# Altium PCB GWNv3.PcbDoc
Units mil, origin at the board's own origin, x right, y up, seen from the top; angles counter-clockwise.
Board outline 3000 x 2200 mil, 2 copper layers (Top Layer, Bottom Layer); 55 components, 57 nets, 281 pads, 3 vias.
Unrouted connection lines stored in the file: 1.
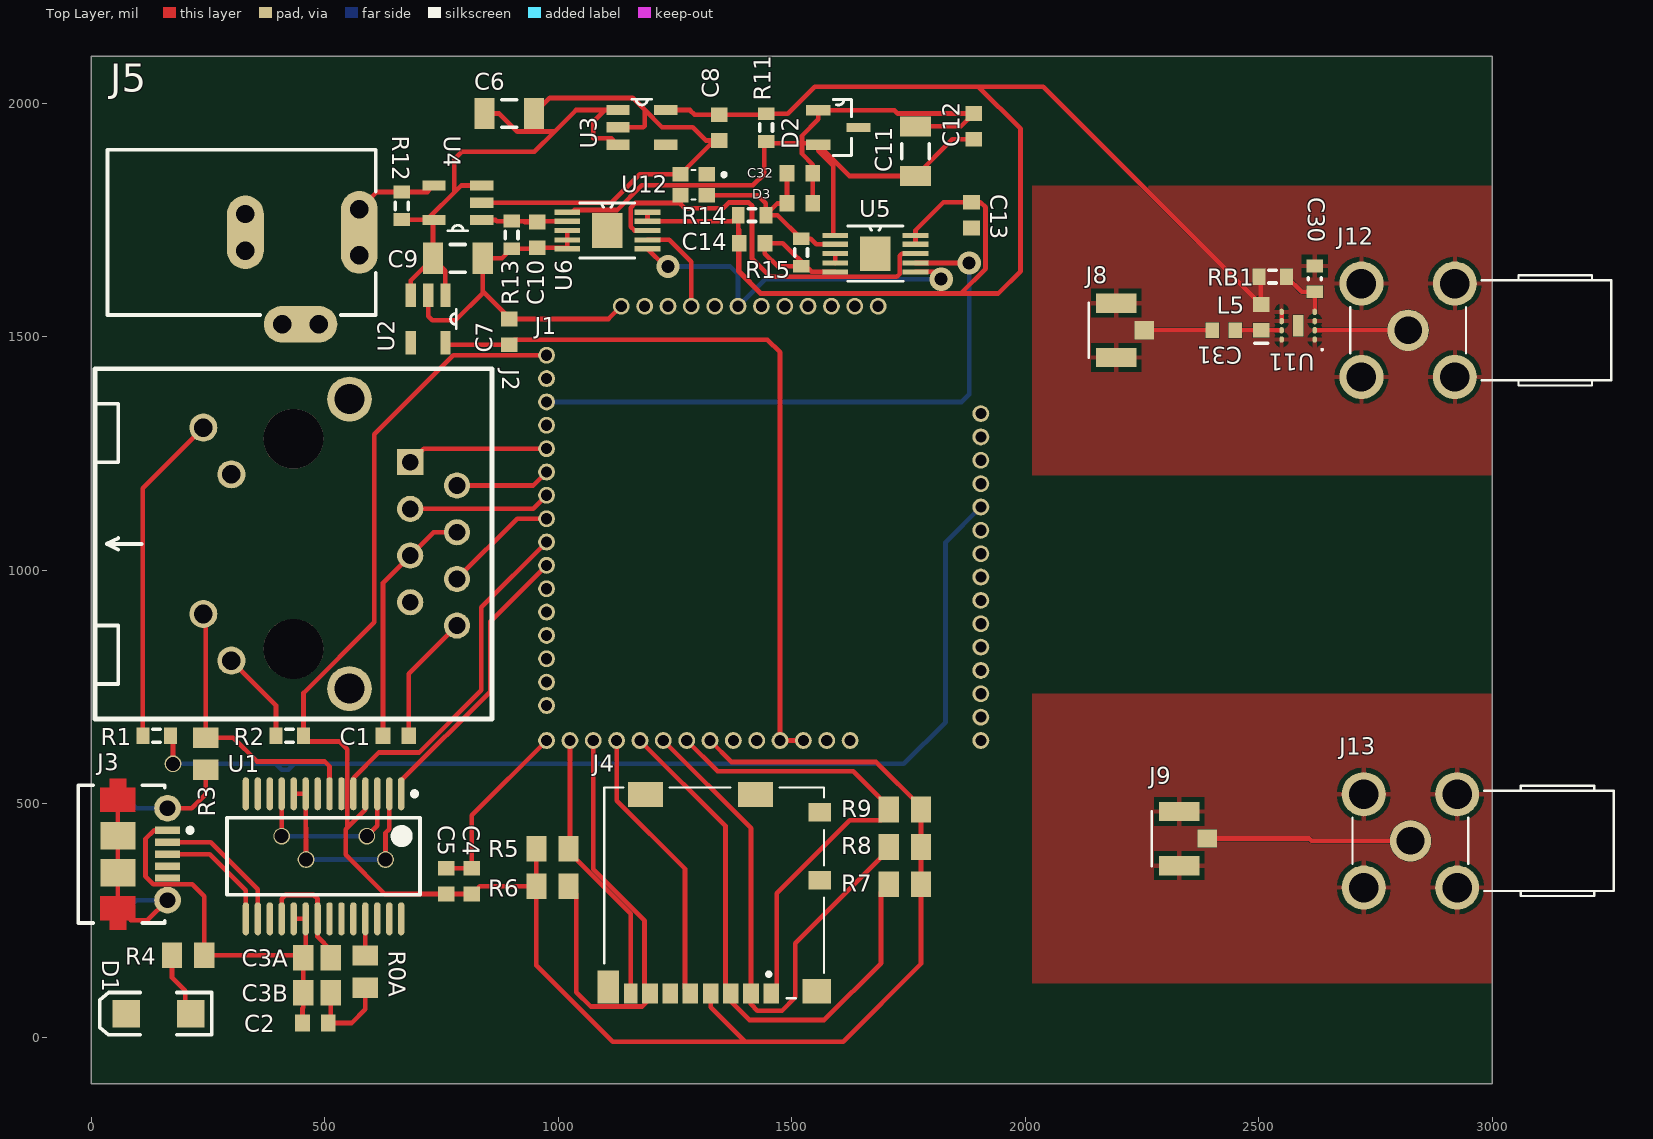
[diagram p0: Top Layer view]
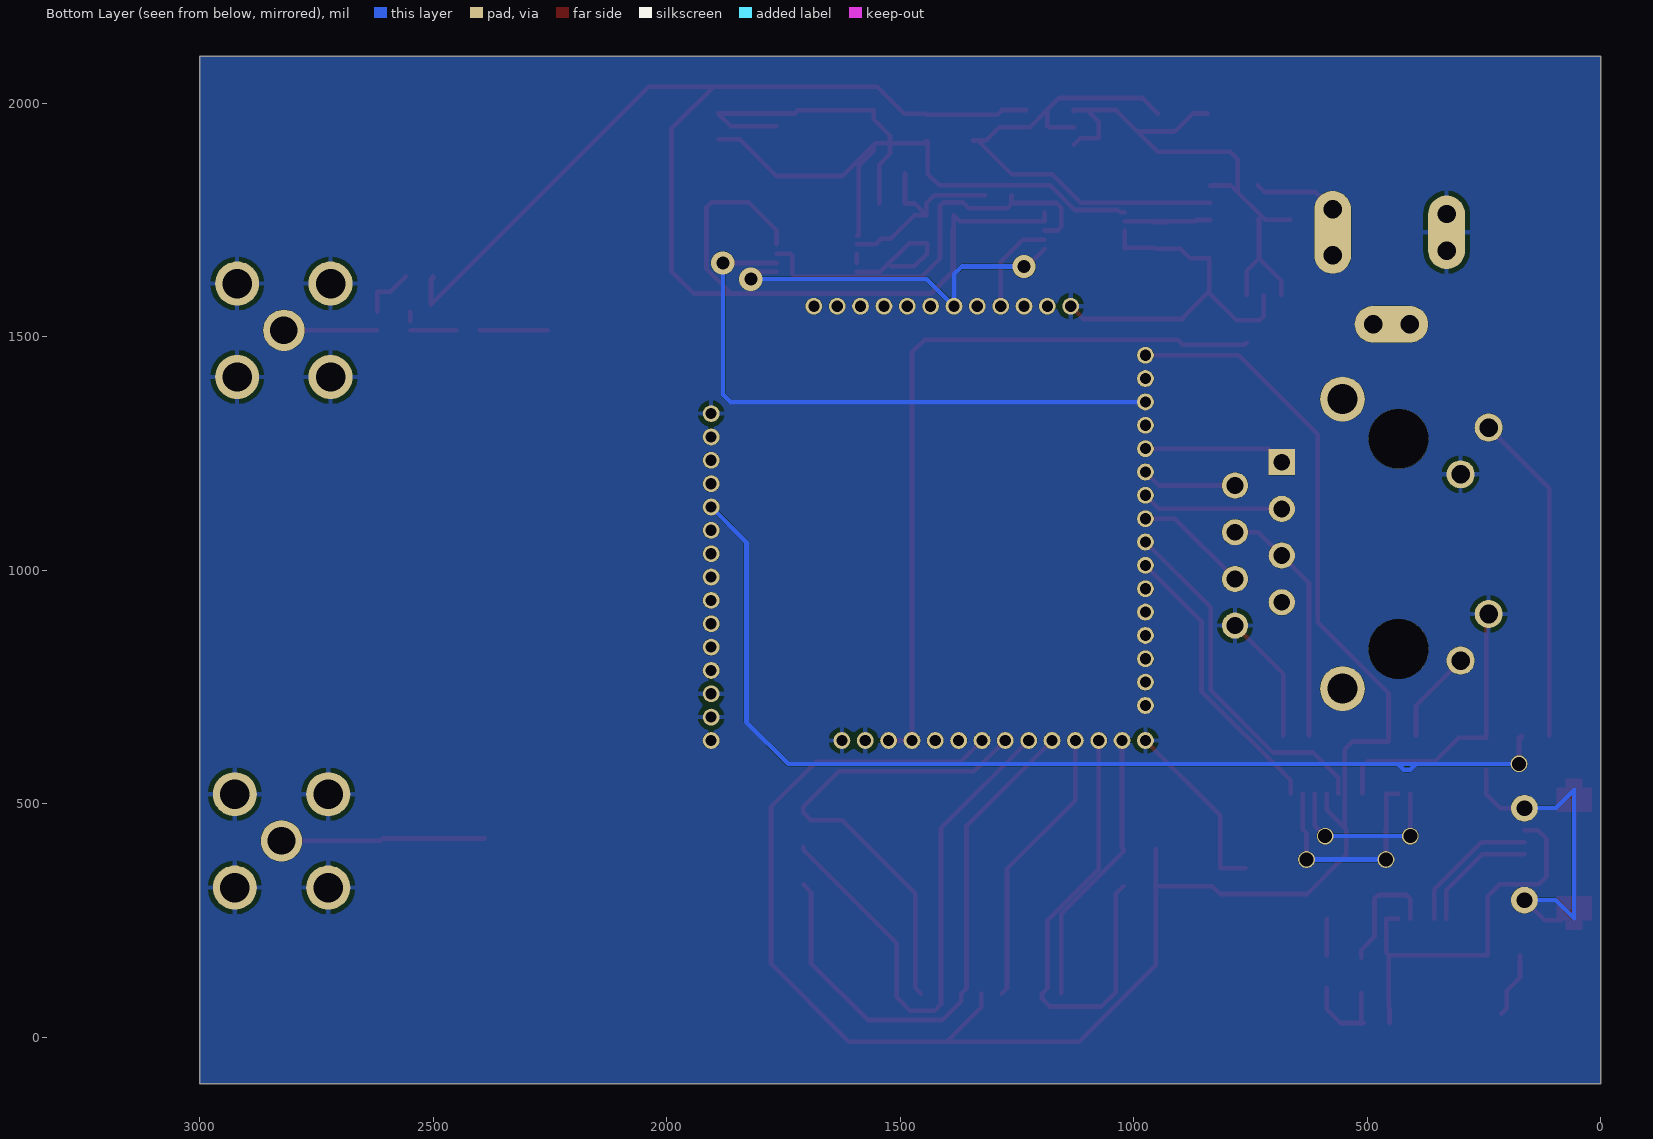
[diagram p1: Bottom Layer view, seen from below]

## Layer stack, top to bottom
Top Solder: solder mask 0.4, Solder Resist, Dk 3.5
Top Layer: signal copper 1.4
Dielectric 1: dielectric 12.6, FR-4, Dk 4.8
Bottom Layer: signal copper 1.4
Bottom Solder: solder mask 0.4, Solder Resist, Dk 3.5

## Board outline
0,-100 3000,-100 3000,2100 0,2100

## Design rules (kind name [scope] priority, off if disabled: settings)
Clearance [All] p1: gap=0 ignorepadtopadclearanceinfootprint=TRUE
HoleToHoleClearance [All] p1: gap=5 allowstackedmicrovias=TRUE
MinimumSolderMaskSliver [All] p1: minsoldermaskwidth=1
PolygonConnect [All] p1: connectstyle=Relief reliefconductorwidth=10 reliefentries=4 polygonreliefangle="90 Angle" airgapwidth=10
RoomDefinition Feedback [InComponentClass('Feedback')] p1: confinementstyle=ConfineIn formatcopy=TRUE lockcomponents=FALSE outline 20.79,1468.2 20.79,2004.68 666.54,2004.68 666.54,1954.32 1935,1954.32 1935,1601.98 919.25,1601.98 919.25,1443.95 803.11,1443.95 803.11,1442.56 658.5,1442.56 658.5,1468.2
RoomDefinition BridgeRF [InComponentClass('BridgeRF')] p2: confinementstyle=ConfineIn formatcopy=TRUE lockcomponents=FALSE outline 1985,8.43 3000,8.43 3000,1963.47 1985,1963.47
RoutingVias [All] p1: holewidth=28 width=50 viastyle="Through Hole" minholewidth=15 minwidth=30 maxholewidth=28 maxwidth=50
SilkToSilkClearance [All] p1: silktosilkclearance=1
SilkToSolderMaskClearance [IsPad] p1: minsilkscreentomaskgap=1 clearancetoexposedcopper=TRUE
SolderMaskExpansion [All] p1: expansion=4
Width [All] p1: maxlimit=10 minlimit=7 preferedwidth=10
26 further rules are at their usual default settings.

## Classes and differential pairs
component class Feedback: C6 C7 C8 C9 C10 C11 C12 C13 C14 C32 D2 D3 J5 R11 R12 R13 R14 R15 U2 U3 U4 U5 U6 U12
component class MCU: C1 C2 C3A C3B C4 C5 D1 J1 J2 J4 R0A R1 R2 R3 R4 R5 R6 R7 R8 R9 U1
component class BridgeRF: C30 C31 J8 J9 J12 J13 L5 RB1 U11

## Components (designator, comment, footprint, x,y, rotation, side; value= is the part's Value field where it differs from the comment)
C1 "100nF" 1608[0603] 652.41,645 r0 top
C2 "100nF" 1608[0603] 480,30 r180 top
C3A "4.7uF" C0805 483.4,170 r180 top
C3B "4.7uF" C0805 483.4,95 r180 top
C4 "10nF" 1608[0603] 815,333.83 r270 top
C5 "100nF" 1608[0603] 760.59,333.83 r270 top
C6 "Cap" C1206 895,1977.56 r0 top value=1.0nF
C7 "Cap" 1608[0603] 895,1510 r270 top value=2.2nF
C8 "Cap" 1608[0603] 1345,1947.56 r90 top value=2.2nF
C9 "Cap" C1206 785,1667.56 r0 top value=10uF
C10 "100nF" 1608[0603] 955,1717.53 r90 top
C11 "Cap" C1206 1765,1896.85 r90 top value=10uF
C12 "Cap" 1608[0603] 1890,1950 r90 top value=100nF
C13 "Cap" 1608[0603] 1885,1760 r270 top value=100nF
C14 "Cap" 1608[0603] 1415,1700 r0 top value=100nF
C30 "10nF" CAPC0603(1608)100_L 2620,1623.43 r270 top
C31 "1pF" CAPC1608X90X35LL10T15 2425,1513.43 r0 top
C32 "Cap" 1608[0603] 1517.56,1850 r0 top value=100nF
D1 "LED2" 3.2X1.6X1.1 143.9,50 r180 top
D2 "LM4040DIM3-4_1" SOT95P237X112-3N 1600,1947.56 r0 top
D3 "2.5V Zener" 1608[0603] 1517.44,1785 r180 top
J1 "Vocore2  Mount" "Vocore2_Mount_One_Row_ No_Labels" 975,591 r0 top
J2 "J0011D01BNL" J00-00XXNL_J00-0061NL(Primary) 433,1056 r90 top
J3 "105017-0001" USB-MICRO-B_V 110.17,391.58 r270 top
J4 "104031-0811" MOLEX_104031-0811_104031-0811(Primary) 1333.98,297.94 r0 top
J5 "PWR2.5" KLD-0202 34.72,1723.19 r0 top
J8 "1909763-1" TE_1909763-1 2195,1513.43 r90 top
J9 "1909763-1" TE_1909763-1 2329.96,425 r90 top
J12 "5-1814400-1" CONN_5-1814400-1 2820,1513.43 r180 top
J13 "5-1814400-1" CONN_5-1814400-1 2825,420 r180 top
L5 "1.2nH" INDC1608L 2505,1540.98 r90 top
R0A "0" RESC2013X06N 586.98,140 r90 top
R1 "330" J1-0603 140,645 r180 top
R2 "330" J1-0603 425,645 r180 top
R3 "100" RESC2013X06N 245,606.62 r90 top
R4 "100" RESC2013X06N 207.41,175 r180 top
R5 "10K" RESC2012X07N_0805 987.59,403 r180 top
R6 "10K" RESC2012X07N_0805 987.59,323 r180 top
R7 "10K" RESC2012X07N_0805 1742.41,327 r0 top
R8 "10K" RESC2012X07N_0805 1742.41,407 r0 top
R9 "10K" RESC2012X07N_0805 1742.41,487 r0 top
R11 "Res3" J1-0603 1445,1947.56 r90 top value=100
R12 "0.1" J1-0603 665,1780 r270 top
R13 "10k" J1-0603 900,1717.53 r270 top
R14 "15k" J1-0603 1415,1760 r0 top
R15 "15k" J1-0603 1520,1680 r90 top
RB1 "4k" J1-0603 2530,1628.43 r0 top
U1 "FT232RL-Reel" SSOP-28_L 497.41,387 r270 top
U2 "AP2204K-5.0TRG1" SOT95P280X145-5N 721.38,1537.56 r270 top
U3 "AP2204K-5.0TRG1" SOT95P280X145-5N 1179,1948 r0 top
U4 "INA194AIDBVT" SOT95P280X145-5N 785,1786.5 r180 top
U5 "ADC141S628QIMMX/NOPB" SOP50P490X110-11N 1679,1677.56 r0 top
U6 "ADC141S628QIMMX/NOPB" SOP50P490X110-11N 1105,1727.06 r0 top
U11 "MAAL-011130" PQFN50P200X200X100_HS-9N 2584.57,1523.27 r180 top
U12 "SG-210STF_1.2000ML" OSCCC200X160X50 1290,1825 r180 top

## Footprints (in the part's own frame and the unit in brackets; to place one, negate y for a bottom-side part, rotate by r counter-clockwise, add the part's x,y. Pads: shape width x height; smd on the part's side, far side on the other; paste and mask are expansions set on the pad)
3.2X1.6X1.1 [mm] "SMT LED; 2 Flat Leads"
  rect 1.5x1.5 smd: 1(-1.75,0) 2(1.75,0)
  silkscreen extent -2.9,-1.15 3.2,1.15
1608[0603] [mm] "Chip Capacitor, Body 1.6x0.8mm, IPC High Density"
  rect 0.8x0.9 smd: 1(-0.7,0) 2(0.7,0)
  body extent -0.87,-0.48 0.87,0.48, height 1.3
C0805 [mm] "Chip Capacitor, Body 2.0x1.3mm, IPC High Density"
  rect 1.1x1.4 smd: 1(-0.75,0) 2(0.75,0)
  body extent -1.1,-0.72 1.1,0.72, height 1.4
C1206 [mm] "Chip Capacitor, Body 3.2x1.6mm, IPC High Density"
  rect 1.1x1.7 smd: 1(-1.35,0) 2(1.35,0)
  silkscreen extent -0.4,-0.75 0.4,0.75, body extent -1.7,-0.9 1.7,0.9, height 1.3
CAPC0603(1608)100_L [mm] "Chip Capacitor, Body 1.6x0.8mm, Height 1.0mm, IPC High Density"
  rect 0.7x0.9 smd: 1(-0.7,0) 2(0.7,0)
  silkscreen extent -0.05,-0.35 0.05,0.35, body extent -0.87,-0.47 0.88,0.48, height 1
CAPC1608X90X35LL10T15 [mm] "Chip Capacitor, 2-Leads, Body 1.60x0.80mm, IPC High Density"
  rect 0.75x0.85 smd: 1(-0.625,0) 2(0.625,0)
  body extent -0.85,-0.45 0.85,0.45, height 0.9
CONN_5-1814400-1 [mm]
  round 2.4 hole 1.6: 1(2.54,2.54) 2(-2.54,2.54) 3(-2.54,-2.54) 4(2.54,-2.54)
  round 2.25 hole 1.5: 5(0,0)
  silkscreen extent -11.05,-3 3.15,3
INDC1608L [mm] "Chip Inductor, Body 1.6x0.8mm, IPC High Density"
  rect 0.8x0.9 smd: 1(-0.7,0) 2(0.7,0)
  silkscreen extent -1.4,-0.35 -1.4,0.35, body extent -0.87,-0.48 0.87,0.48, height 0.55
J00-00XXNL_J00-0061NL(Primary) [mil]
  rect 56x56 hole 36: 1(175,-250)
  round 56 hole 36: 2(125,-350) 3(75,-250) 4(25,-350) 5(-25,-250) 6(-75,-350) 7(-125,-250) 8(-175,-350)
  round 60 hole 40: 9(249,193) 10(149,133) 11(-150,193) 12(-250,133)
  round 128 hole 128 unplated: None(-225,0) None(225,0)
  round 96 hole 64: S1(-310,-120) S2(310,-120)
  silkscreen extent -375,-425 375,425
J1-0603 [mm] "Chip Resistor, Body 1.6x0.8mm, IPC High Density"
  rect 0.7x0.9 smd: 1(-0.75,0) 2(0.75,0)
  silkscreen extent -0.2,-0.35 0.2,0.35, body extent -0.85,-0.48 0.85,0.48, height 0.9
KLD-0202 [mm] "DC Power Jack, 2.5mm, KLD Series, PCB Mount"
  oval 2x4.5 all layers, no hole: 1(13.7,0)
  round 1.5 hole 1: 1A(13.7,-1.25) 1B(13.7,1.25) 2A(7.5,-1) 2B(7.5,1) 3A(9.5,-5) 3B(11.5,-5)
  oval 2x4 all layers, no hole: 2(7.5,0)
  oval 4x2 all layers, no hole: 3(10.5,-5)
  silkscreen extent 0,-4.5 14.6,4.5
MOLEX_104031-0811_104031-0811(Primary) [mm]
  rect 0.85x1.1 smd: 1(3.105,-5.2) 3(0.905,-5.2) 4(-0.195,-5.2) 5(-1.295,-5.2) 6(-2.395,-5.2) 7(-3.495,-5.2)
  rect 0.875x1.1 smd: 2(2.005,-5.2)
  rect 0.75x1.1 smd: 8(-4.545,-5.2)
  rect 1.2x1 smd: 9(5.74,0.95) 10(5.74,4.65)
  rect 1.55x1.35 smd: G1(5.565,-5.075)
  rect 1.17x1.8 smd: G2(-5.755,-4.85)
  rect 1.9x1.35 smd: G3(-3.73,5.625) G4(2.24,5.625)
  silkscreen extent -5.97,-5.45 5.97,6
OSCCC200X160X50 [mm]
  rect 0.89x0.79 smd: 1(-0.715,-0.565) 2(0.715,-0.565) 3(0.715,0.565) 4(-0.715,0.565)
  silkscreen extent -1.75,-0.8 0.1,0.8
PQFN50P200X200X100_HS-9N [mm] "PQFN, 8-Leads, Body 2.00x2.00mm, Pitch 0.50mm, Thermal Pad 0.58x1.18mm, IPC Medium Density"
  oval 0.25x0.35 smd: 1(-0.9,0.75) 2(-0.9,0.25) 3(-0.9,-0.25) 4(-0.9,-0.75) 5(0.9,-0.75) 6(0.9,-0.25) 7(0.9,0.25) 8(0.9,0.75)
  rect 0.58x1.18 smd: 9(0,0)
  silkscreen extent -1.35,1.25 -1.25,1.35, body extent -1,-1 1,1, height 1
RESC2012X07N_0805 [mm] "Chip Resistor, 2-Leads, Body 2.00x1.22mm, IPC Medium Density"
  rect 1.1x1.4 smd: 1(-0.875,0) 2(0.875,0)
  body extent -1.07,-0.7 1.08,0.7, height 0.65
RESC2013X06N [mm] "Chip Resistor, 2-Leads, Body 2.00x1.27mm, IPC Medium Density"
  rect 1.1x1.4 smd: 1(-0.875,0) 2(0.875,0)
  body extent -1.07,-0.7 1.08,0.7, height 0.65
SOP50P490X110-11N [mil]
  rect 55x11 smd: 1(-86,39) 2(-86,20) 3(-86,0) 4(-86,-20) 5(-86,-39) 6(86,-39) 7(86,-20) 8(86,0) 9(86,20) 10(86,39)
  rect 66x74 smd: 11(0,0)
  silkscreen extent -59,-59 59,59
SOT95P237X112-3N [mil]
  rect 52x22 smd: 1(-43,37) 2(-43,-37)
  rect 52x20 smd: 3(43,0)
  silkscreen extent -11,-60 28,60
SOT95P280X145-5N [mil]
  rect 50x22 smd: 1(-51,37) 2(-51,0) 3(-51,-37) 4(51,-37) 5(51,37)
  silkscreen extent -21,48 21,60
SSOP-28_L [mm] "SOP, 28-Leads, Body 10.2x5.3mm, Pitch 0.65mm, IPC High Density"
  oval 1.8x0.35 smd: 1(-3.4,4.225) 2(-3.4,3.575) 3(-3.4,2.925) 4(-3.4,2.275) 5(-3.4,1.625) 6(-3.4,0.975) 7(-3.4,0.325) 8(-3.4,-0.325) 9(-3.4,-0.975) 10(-3.4,-1.625) 11(-3.4,-2.275) 12(-3.4,-2.925) 13(-3.4,-3.575) 14(-3.4,-4.225) 15(3.4,-4.225) 16(3.4,-3.575) 17(3.4,-2.925) 18(3.4,-2.275) 19(3.4,-1.625) 20(3.4,-0.975) 21(3.4,-0.325) 22(3.4,0.325) 23(3.4,0.975) 24(3.4,1.625) 25(3.4,2.275) 26(3.4,2.925) 27(3.4,3.575) 28(3.4,4.225)
  silkscreen extent -3.52,-5.25 2.1,5.25, body extent -2.8,-5.25 2.8,5.25, height 2
TE_1909763-1 [mm]
  rect 1x1.05 smd: 1(0,-1.525)
  rect 1.05x2.2 smd: 2(-1.475,0) 3(1.475,0)
  silkscreen extent -1.5,1.5 1.5,1.5
USB-MICRO-B_V [mm] "USB, MICRO B, Body 7.491x4.695 mm, Pitch 0.65 mm"
  rect 0.4x1.35 smd: 1(-1.3,1.35) 2(-0.65,1.35) 3(0,1.35) 4(0.65,1.35) 5(1.3,1.35)
  round 1.45 hole 0.85: 6(-2.5,1.35) 7(2.5,1.35)
  rect 1.5x1.9 smd: 9(-1,-1.35) 10(1,-1.35)
  Top Layer region: -2.3,-2.3 -2.3,-0.4 -3.6,-0.4 -3.6,-2.3
  Top Layer region: 2.3,-0.4 2.3,-2.3 3.6,-2.3 3.6,-0.4
  Top Layer region: 3.6,-0.9 3.6,-1.8 4.1,-1.8 4.1,-0.9
  Top Layer region: -3.6,-1.8 -3.6,-0.9 -4.1,-0.9 -4.1,-1.8
  silkscreen extent -3.75,-3.5 3.75,2.7, body extent -4.1,-3.9 4.1,1.5, height 2.67
"Vocore2_Mount_One_Row_ No_Labels" [mil]
  round 36 hole 24: 1(0,869) 2(0,819) 3(0,769) 4(0,719) 5(0,669) 6(0,619) 7(0,569) 8(0,519) 9(0,469) 10(0,419) 11(0,369) 12(0,319) 13(0,269) 14(0,219) 15(0,169) 16(0,119) 17(0,44) 18(50,44) 19(100,44) 20(150,44) 21(200,44) 22(250,44) 23(300,44) 24(350,44) 25(400,44) 26(450,44) 27(500,44) 28(550,44) 29(600,44) 30(650,44) 31(930,44) 32(930,94) 33(930,144) 34(930,194) 35(930,244) 36(930,294) 37(930,344) 38(930,394) 39(930,444) 40(930,494) 41(930,544) 42(930,594) 43(930,644) 44(930,694) 45(930,744) 46(710,974) 47(660,974) 48(610,974) 49(560,974) 50(510,974) 51(460,974) 52(410,974) 53(360,974) 54(310,974) 55(260,974) 56(210,974) 57(160,974)

## Part data
C1 C2 C3A C3B C4 C5 C6 C7 C8 C9 C10 C11 C12 C13 C14 C32: library part "Cap Semi", "Capacitor (Semiconductor SIM Model)", LatestRevisionDate=29-May-2009, LatestRevisionNote="IPC-7351 Footprint Added.", PackageDescription="Chip Capacitor", PackageReference=C1206, Published=8-Jun-2000, Publisher="Altium Limited"
C30: library part CMP-1035-02302-1, "CAP 10nF 6.3V ±10% 0603 (1608 Metric) Thickness 1mm SMD", Case-EIA=0603, Case-Metric=1608, Rated Voltage="6.3 V", Tolerance=±10%, Max Thickness="1 mm", Technology=SMT
C31: library part CMP-2006-02464-1, Manufacturer=Murata, Part Number=GRM1885C1H1R0CA01D
D1: "Typical RED, GREEN, YELLOW, AMBER GaAs LED", LatestRevisionDate=17-Jul-2002, LatestRevisionNote="Re-released for DXP Platform.", PackageDescription="SM LED; 2 Flat Leads", PackageReference=3.2X1.6X1.1, PackageVersion=Feb-2002, Published=8-Jun-2000, Publisher="Altium Limited"
D2: "IC VREF SHUNT 4.096V SOT23", Package="SOT23 Texas Instruments", Availability=Good, MF="Texas Instruments", MP=LM404DIM4-4.1, Price="0.41 USD"
D3: library part Diode, "Default Diode", Code_JEDEC=DO-214-AB, LatestRevisionDate=17-Jul-2002, LatestRevisionNote="Re-released for DXP Platform.", PackageDescription="DO-214-AB/SMC; 2 C-Bend Leads; Body 7.9 x 5.9 mm, inc. leads (LxW)", PackageReference=SOD323, PackageVersion=Sep-1996, Published=8-Jun-2000, Publisher="Altium Limited"
J1: library part Vocore2_Pins
J2: "CONN MAGJACK 1PORT 100 BASE-TX", Manufacturer="Pulse Electronics Network", Supplier Part Number 1=553-1483-ND, Manufacturer Part Number=J0011D01BNL, Supplier 1=Digi-Key, URL=https://www.digikey.com/short/q8f3j9
J3: library part CMP-2000-05827-1, "Micro-USB B Receptacle, Right Angle, Bottom Mount, Surface Mount, with Solder Tabs, -30 to 85 degC, 5-Pin USB, RoHS, Tape and Reel", Manufacturer=Molex, Package Description="5-Leads USB, Micro B, Body 7.5 x 5 mm, Pitch 0.65 mm", Package Reference=MICRO-B, Package Version="Rev. F, 12/2012", Standard Package=1, Voltage - Max=30V, 3D Model=105017-0001.stp, Catalog Drawings=1050170001, Category=Connectors,Interconnects, Circuits=5, Connector Type=USB-microB, Datasheet URL=http://www.molex.com/elqNow/elqRedir.htm?ref=http://www.molex.com/webdocs/datasheets/pdf/en-us/1050170001_IO_CONNECTORS.pdf, Datasheet Version=03/2016, Family=USB,DVI,HDMIConnectors, Featured Product=Micro-USBConnectorsUSBConnectors, Features=Shielded,SolderRetention, Gender=Receptacle, Ingress Protection=-, Manufacturer URL=http://www.molex.com/, Mating Products=WM17145-ND-CABLEMICROUSBBTOSTDA1.0MWM17147-ND-CABLEMICROUSBBTOSTDA2.0MWM17146-ND-CABLEMICROUSBBTOSTDA1.5M, Mounting Technology=SurfaceMount, Mounting Type=BoardCutout,SurfaceMount,RightAngle, Number of Contacts=5, Online Catalog=Molex-MicroUSB, Other Names=WM1399DKR, Package URL=http://www.molex.com/pdm_docs/sd/1050170001_sd.pdf, Packaging=Digi-Reel®, PCN Assembly/Origin=ResinSupplier21/Oct/2015, RoHS Information=1050170001CertofCompliance, Series=-, Specifications=-
J4: "1.10mm Pitch microSD Memory Card Connector, SMT, Push-Pull Type, 1.42mm Height, with Detect Switch", Manufacturer=Molex, Supplier Part Number 1=WM6357CT-ND, Manufacturer Part Number=104031-0811, Part Number=104031-0811, Supplier=Arrow, Supplier 1=Digi-Key, URL=https://www.arrow.com/en/products/1040310811/molex?utm_source=octopart&utm_medium=aggregator&utm_campaign=octopart_2017&utm_content=inv_listing&utm_keyword=1040310811
J5: "Low Voltage Power Supply Connector", ComponentLink1Description="Manufacturer Link", ComponentLink1URL=http://domino.kycon.com/internet/Products.html, DatasheetDocument=09-May-2002, Published=17-Dec-2003, Publisher="Altium Limited"
J8 J9: "CONN UMCC JACK STR 50OHM SMD", Package=None, Availability=Good, MF="TE Connectivity", MP=1909763-1, Number_of_Positions=1, Price="0.28 USD"
J12 J13: "SMA R/A PCB Skt GZD", Package=None, Digi-Key_Part_Number=A97593-ND, Digi-Key_Purchase_URL=https://www.digikey.com/product-detail/en/te-connectivity-amp-connectors/5-1814400-1/A97593-ND/1755981?WT.z_cid=ref_snapeda&utm_source=snapeda&utm_medium=aggregator&utm_campaign=buynow, EU_RoHS_Compliance=Compliant, Link=http://www.te.com/usa-en/product-5-1814400-1.html, MF="TE Connectivity", MP=5-1814400-1, Number_of_Positions=1, SnapEDA_Link=https://www.snapeda.com/symbols-footprints/5-1814400-1/TE%20Connectivity%20AMP%20Connectors/view-part/?ref=snap
L5: library part Inductor, "Inductor", Manufacturer=Murata, Part Number=LQG15WH1N2S02D
R0A R1 R2 R3 R4 R5 R6 R7 R8 R9 R12 R13 R14 R15 RB1: library part Res3, "Resistor", LatestRevisionDate=29-May-2009, LatestRevisionNote="IPC-7351 Footprint Added.", PackageDescription="Chip Resistor", PackageReference=J1-0603, Published=8-Jun-2000, Publisher="Altium Limited"
R11: "Resistor", LatestRevisionDate=29-May-2009, LatestRevisionNote="IPC-7351 Footprint Added.", PackageDescription="Chip Resistor", PackageReference=J1-0603, Published=8-Jun-2000, Publisher="Altium Limited"
U1: library part CMP-0078-00029-3, "USB UART Asynchronous Serial Data Transfer Chip, 28-pin SSOP, Tape and Reel", Manufacturer=FTDI, ComponentLink1Description="Manufacturer URL", ComponentLink1URL=http://www.ftdichip.com/, ComponentLink2Description=Datasheet, ComponentLink2URL=http://www.ftdichip.com/Support/Documents/DataSheets/ICs/DS_FT232R.pdf, DatasheetVersion="ver 2.10, Mar-2012", PackageDescription="28-Pin Small Outline Package 0.65 mm Pitch", PackageReference=SSOP-28, PackageVersion=Mar-12, PartNumber=FT232RL-Reel, RevisionNote="DatasheetVersion updated to 2.10 Mar-2012"
U2 U3: "IC REG LINEAR 5V 150MA SOT23-5", Package="SOT-23-5 Diodes Inc.", Availability=Good, MF="Diodes Inc.", MP=AP2204K-5.0TRG1, Price="0.20 USD"
U4: "IC CURRENT MONITOR 3% SOT23-5", Package="SOT-23 Texas Instruments", Availability=Good, MF="Texas Instruments", MP=INA194AIDBVT, Price="1.55 USD"
U5 U6: "IC CONVERTER A/D 14-BIT 10-MSOP", Package="MSOP-10 Texas Instruments", Availability=Good, MF="Texas Instruments", MP=ADC141S628QIMMX/NOPB, Price="4.07 USD"
U12: "Spxo 1.6-3.6v 50ppm -40/+85c", Package="SMD-4 Epson", Availability=Bad, MF=EPSON, MP="SG-210STF 1.2000ML", Price="1.41 USD", SnapEDA_Link=https://www.snapeda.com/symbols-footprints/SG-210STF%201.2000ML/EPSON/view-part/?ref=snap

## Free pads (board coordinates)
  round 36 hole 30: ""(175,585) ""(407.84,430) ""(460,380) ""(590,430) ""(630,380)

## Via types
v1: diameter 50, hole 28, Top Layer to Bottom Layer, 3 vias

## Nets (pads, with @x,y where several pads share a name; then routed paths per layer and width w, separated by ;. In a path a pad name is that pad's centre, name@x,y a point inside that pad or via, vN(x,y) a via of type N, cw(c..) or ccw(c..) an arc to the next point about the centre after c; other vN are vias at no path point)
3V3: C4.2 C5.2 J1.1 J1.24 J4.4 R2.1 R5.2 R6.2 R7.2 R8.2 R9.2 U1.4 | length 4217
  Top Layer w10: U1.4 586.98,486.95 548,447.97 ; R5.2 R6.2 ; J1.1 775,1460 605.9,1290.9 605.9,888 454.53,736.62 R2.1 454.53,633 531,633 548,616 548,447.97 ; J1.24 1371.13,588.87 1680.9,588.87 1776.86,492.91 R9.2 R8.2 R7.2 1776.86,156.86 1610,-10 1400,-10 ; J4.4 1326.31,63.69 1400,-10 ; 548,447.97 545,444.97 545,390 628.73,306.27 C5.2 C4.2 831.73,323 R6.2 ; R6.2 953.14,153.31 1116.45,-10 1400,-10
5V_MCU: C7.2 J1.27 J1.28 U2.5 | length 1614.9
  Top Layer w10: U2.5 762.5,1482.44 C7.2 905.56,1493 1448,1493 1475,1466 J1.27 J1.28
5V_RF: C8.2 C13.1 C14.1 L5.2 R11.2 R14.1 RB1.1 U3.5 U5.9 U5.10 U6.9 U6.10 | length 3551.9
  Top Layer w10: U6.10 U6.9 1372.53,1747.06 R14.1 1385.47,1730.97 ; U3.5 1282,1985 1291.88,1975.12 C8.2 1443.03,1975.12 R11.2 1491.31,1977.09 1549.03,2034.8 1899.8,2034.8 ; U5.9 U5.10 1765,1727.56 1825,1787.56 C13.1 1904,1787.56 1915,1776.56 1915,1645 1862.17,1592.17 ; RB1.1 2500.47,1624 2505,1624 L5.2 2038.74,2034.8 1899.8,2034.8 ; 1385.47,1730.97 1385.47,1639.53 1432.83,1592.17 1435.27,1592.17 ; 1385.47,1730.97 1387.44,1729 C14.1 1387.44,1640 1435.27,1592.17 ; 1435.27,1592.17 1862.17,1592.17 ; 1862.17,1592.17 1942.17,1592.17 1990,1640 1990,1944.61 1899.8,2034.8
12V: C6.1 C9.1 R12.2 U2.1 U2.3 U3.1 U3.3 U4.3 U4.5 | length 1249.6
  Top Layer w10: R12.2 718.97,1750.47 U4.5@726,1757.5 ; U2.3 684.38,1620.09 C9.1 ; U2.1 758.38,1641.03 C9.1 ; U4.3 792,1823.5 777,1808.5 ; C6.1 873.44,1977.56 912,1939 992,1939 ; U3.3@1128,1912 U3.3 1114,1925 1075,1925 1075,1960 1100,1985 ; U3.1@1128,1983 U3.1 1100,1985 ; U4.5@726,1757.5 777,1808.5 ; U4.5@726,1757.5 U4.5 731.85,1749.5 C9.1 ; 777,1808.5 777,1880 793,1896 949,1896 992,1939 ; 992,1939 1038,1985 1100,1985
ADC_I: J1.54 U6.7 | length 208.5
  Top Layer w10: U6.7 1237.94,1707.06 1285,1660 J1.54
ADC_V: J1.3 U5.7 | length 1308.2
  Top Layer w10: U5.7 v1(1880,1657.56)
  Bottom Layer w10: J1.3 1864,1360 1880,1376 v1(1880,1657.56)
CSB: J1.52 U5.6 U6.6 | length 805.3
  Top Layer w10: U6.6 1229.06,1650 v1(1235,1650) ; U5.6 1804.44,1638.56 v1(1820,1623)
  Bottom Layer w10: v1(1235,1650) 1368,1650 1385,1633 J1.52 1443,1623 v1(1820,1623)
GND: C1.2 C2.1 C3A.1 C3B.1 C4.1 C5.1 C6.2 C7.1 C8.1 C9.2 C10.1 C11.2 C12.2 C13.2 C14.2 C30.1 C32.2 D1.2 D2.1 D3.1 J1.17 J1.29 J1.30 J1.32 J1.33 J1.45 J1.57 J2.8 J2.10 J2.11 J3.5 J4.6 J4.G1 J4.G2 J4.G3 J4.G4 J5.2 J5.2A J5.2B J8.2 J8.3 J9.2 J9.3 J12.1 J12.2 J12.3 J12.4 J13.1 J13.2 J13.3 J13.4 R0A.1 R3.2 R13.2 R15.1 U1.7 U1.18 U1.21 U2.2 U3.2 U4.2 U5.3 U5.4 U5.5 U6.3 U6.4 U6.5 U11.1 U11.3 U11.5 U11.6 U11.8 U12.2 | length 4703.7
  Top Layer w10: J2.11 245,901 R3.2 303.94,641.06 355,590 500,590 510.2,579.8 U1.7 ; U1.18 407.84,296 415.84,304 476.61,304 484.61,296 U1.21 484.61,214.69 512.93,186.37 C3A.1 ; C3B.1 512.93,35.37 C2.1 557.42,30 586.98,59.56 R0A.1 ; C1.2 679.97,777.97 J2.8 ; U2.2 721.38,1543.62 730,1535 780,1535 838.15,1593.15 ; C5.1 C4.1 815,475 J1.17 ; U4.2 1113.74,1786.5 1174.49,1847.24 U12.2 C8.1@1334.61,1920 ; C6.2 981.59,2011 1159.21,2011 1185,1985.21 ; U6.3 U6.4 U6.5 1017.09,1689.97 C10.1 953.03,1688 R13.2 879.56,1667.56 C9.2 838.15,1593.15 ; U3.2 1182,1948 1185,1951 1185,1985.21 ; J1.57 1107.56,1537.56 C7.1 895,1540 840,1595 838.15,1593.15 ; C8.1 C8.1@1334.61,1920 ; R15.1 1469.62,1650.47 1442.56,1677.53 C14.2 1481,1700 1542.44,1638.56 U5.5 ; D3.1 1545,1817 1545.12,1817.12 C32.2 1545.12,1868 1522,1891.12 1522,1930 1557,1965 D2.1 1720,1984.56 1727,1977.56 C12.2 1862.44,1950 C11.2 ; U5.4 U5.3 ; U11.6 U11.5 ; 1185,1985.21 1222.21,1948 1288,1948 1316,1920 C8.1@1334.61,1920
LED_CTRL: J1.41 pad.@175,585 R1.1 | length 2298.7
  Top Layer w10: R1.1 169.53,641 175,641 pad.@175,585
  Bottom Layer w10: pad.@175,585 395.25,585 ; J1.41 1829.37,1059.37 1829.37,674.37 1740,585 434.75,585 ; 395.25,585 434.75,585 ; 395.25,585 407.75,572.5 422.25,572.5 434.75,585
NetC1_1: C1.1 J2.4 J2.5 | length 530.8
  Top Layer w10: C1.1 624.85,972.85 J2.5 733,1081 J2.4
NetC10_2: C10.2 R13.1 U4.1 U6.2 | length 213.8
  Top Layer w10: U4.1 866,1749.5 868.44,1747.06 R13.1 926,1747.06 ; C10.2 927.97,1745.09 926,1747.06 ; U6.2 926,1747.06
NetC15_1: 
NetC15_2: 
NetC16_2: 
NetC17_2: 
NetC18_2: 
NetC21_1: 
NetC21_2: 
NetC22_1: 
NetC22_2: 
NetC23_2: 
NetC26_2: 
NetC27_1: 
NetC27_2: 
NetC30_2: C30.2 RB1.2 U11.4 | length 117
  Top Layer w10: RB1.2 2592.09,1595.87 C30.2 U11.4
NetC31_1: C31.1 J8.1 | length 145.4
  Top Layer w10: J8.1 C31.1
NetC31_2: C31.2 L5.1 U11.7 | length 99.5
  Top Layer w10: C31.2 L5.1 U11.7
NetC32_1: C32.1 D3.2 R14.2 R15.2 U5.2 U12.4 | length 454.1
  Top Layer w10: U12.4 1427.24,1802.76 1444.53,1785.47 R14.2 ; C32.1 1490,1785.12 D3.2 1469.53,1785 R14.2 ; U5.2 1552.72,1697.56 1540.75,1709.53 R15.2 1469.53,1760 R14.2
NetD1_1: D1.1 R4.2 | length 141.5
  Top Layer w10: R4.2 172.96,127.04 201.31,98.69 201.31,61.49 D1.1
NetJ2_9: J2.9 R1.2 | length 713.7
  Top Layer w10: R1.2 110.47,1175.47 J2.9
NetJ2_12: J2.12 R2.2 | length 200.5
  Top Layer w10: J2.12 395.47,710.53 R2.2
NetJ3_2: J3.2 U1.16 | length 298.5
  Top Layer w10: J3.2 256.12,417.17 356.66,316.62 U1.16
NetJ3_3: J3.3 U1.15 | length 260.7
  Top Layer w10: J3.3 253.43,391.57 331.07,313.93 U1.15
NetJ3_6: J3.6 J3.7 J3.9 J3.10 R3.1 | length 1043.3
  Top Layer w10: 57.02,249.84 J3.10 J3.9 57,529.35 ; 84.58,249.84 120.01,249.84 J3.7 ; J3.6 215,490 245,520 R3.1
  Bottom Layer w10: J3.7 96.39,293.15 57.02,253.78 57.02,529.37 96.39,490 J3.6
NetJ5_1: J5.1 J5.1A J5.1B R12.1 U4.4 | length 279.5
  Top Layer w10: J5.1A J5.1 J5.1B 611.22,1809.53 R12.1 720.03,1809.53 U4.4
NetJ5_3: J5.3 J5.3A J5.3B | length 78.7
  Bottom Layer w10: J5.3A J5.3 J5.3B
NetJ9_1: J9.1 J13.5 | length 437.1
  Top Layer w10: J9.1 2608,425 2613,420 J13.5
NetJ12_5: J12.5 U11.2 | length 200
  Top Layer w10: U11.2 J12.5
NetR0A_2: R0A.2 U1.25 | length 78.7
  Top Layer w10: R0A.2 U1.25
NetRB5_2: 
NetU1_2: pad.@460,380 pad.@630,380 U1.2 U1.9 U1.10 | length 480.7
  Top Layer w10: U1.10 U1.9 pad.@460,380 ; pad.@630,380 630,436.84 638.16,445 U1.2
  Bottom Layer w10: pad.@460,380 pad.@630,380
NetU1_3: pad.@407.84,430 pad.@590,430 U1.3 U1.11 | length 373.2
  Top Layer w10: pad.@407.84,430 U1.11 ; pad.@590,430 612.57,452.57 U1.3
  Bottom Layer w10: pad.@407.84,430 pad.@590,430
P0_R+: J1.5 J2.1 | length 304
  Top Layer w10: J2.1 712,1260 J1.5
P0_R-: J1.6 J2.2 | length 204
  Top Layer w10: J2.2 946,1181 J1.6
P0_T+: J1.7 J2.3 | length 304
  Top Layer w10: J2.3 946,1131 J1.7
P0_T-: J1.8 J2.6 | length 245.4
  Top Layer w10: J2.6 912,1110 J1.8
RXD2: J1.10 U1.1 | length 618.1
  Top Layer w10: U1.1 663.75,549.4 855.05,740.71 855.05,890.05 J1.10
SCLK: U5.8 U6.8 U12.3 | length 896.7
  Top Layer w10: U6.8 1163.36,1727.06 1155,1735.42 1155,1775.86 1165.14,1786 1261.85,1786 ; U12.3 1261.85,1786 ; U5.8 1736,1677.56 1731,1672.56 1731,1634 1725,1628 1454,1628 1415,1667 1415,1780 1408,1787 1365,1787 1353,1775 1270.85,1775 1261.85,1784 1261.85,1786
SD0: J1.18 J4.8 R5.1 | length 598.1
  Top Layer w10: J1.18 1025,405.96 R5.1 1022.04,397.09 1155.05,264.09 J4.8
SD1: J1.19 J4.7 R6.1 | length 1014.6
  Top Layer w10: R6.1 1038.69,306.35 1038.69,96.04 1069.38,65.35 1180,65.35 1196.39,81.74 J4.7 1184.81,104.8 1184.81,249.19 1075,359 J1.19
SD2: J1.20 J4.5 | length 607.2
  Top Layer w10: J1.20 1125,506.43 1271.43,360 1271.43,104.8 J4.5
SD3: J1.21 J4.3 R7.1 | length 1203.5
  Top Layer w10: J1.21 1358.04,451.96 1358.04,104.8 J4.3 1369.61,76.44 1409.48,36.57 1569.8,36.57 1691.31,158.07 1691.31,310.35 R7.1
SD4: J1.22 J4.2 R8.1 | length 1159.7
  Top Layer w10: J1.22 1412.92,447.08 J4.2 1412.92,70.21 1426.57,56.57 1479.17,56.57 1507.57,84.96 1507.57,200.7 1707.96,401.09 R8.1
SD5: J1.23 J4.1 R9.1 | length 1034.9
  Top Layer w10: J1.23 1341.13,568.87 1632,568.87 1707.96,492.91 R9.1 1707.96,481.09 1691.31,464.44 1624.54,464.44 1467.96,307.86 1467.96,104.95 J4.1
TXD2: J1.9 U1.5 | length 760.9
  Top Layer w10: U1.5 562.11,521.58 562.11,555.49 615.9,609.28 701.93,609.28 835.05,742.41 835.05,920.05 J1.9
VBUS: C2.2 C3A.2 C3B.2 J3.1 R4.1 U1.19 U1.20 | length 868.3
  Top Layer w10: J3.1 134.76,442.76 116,424 116,344 133,327 216,327 241.86,301.14 R4.1 C3A.2@453.87,175 ; U1.19 U1.20 459.02,180.15 C3A.2@453.87,175 ; C2.2 452.44,61 453.87,62.43 C3B.2 C3A.2 C3A.2@453.87,175
VREF: C11.1 C12.1 D2.2 R11.1 U5.1 U6.1 | length 1249.6
  Top Layer w10: U6.1 1029,1766.06 1033.94,1771 1126,1771 1179,1824 1417,1824 1441,1848 1441,1918.03 R11.1 1448.74,1914.3 1553.26,1914.3 D2.2 ; U5.1 1589,1716.56 1589,1866 1557,1898 D2.2 ; C12.1 1843.74,1922.44 C11.1 1623.86,1843.7 D2.2
pads on no net: D2.3 J1.2 J1.4 J1.11 J1.12 J1.13 J1.14 J1.15 J1.16 J1.25 J1.26 J1.31 J1.34 J1.35 J1.36 J1.37 J1.38 J1.39 J1.40 J1.42 J1.43 J1.44 J1.46 J1.47 J1.48 J1.49 J1.50 J1.51 J1.53 J1.55 J1.56 J2.7 J2.None J2.S1 J2.S2 J3.4 J4.9 J4.10 U1.6 U1.8 U1.12 U1.13 U1.14 U1.17 U1.22 U1.23 U1.24 U1.26 U1.27 U1.28 U2.4 U3.4 U5.11 U6.11 U11.9 U12.1

## Polygon pours and split planes (outlines as drawn)
GND on Top Layer "GND_L01_P006" (solid, remove dead copper, pour order 6): 3000,115 2015,115 2015,735 3000,735
GND on Top Layer "GND_L01_P000" (solid, remove dead copper, pour order 0): 3000,1203.43 2015,1203.43 2015,1823.43 3000,1823.43
GND on Bottom Layer "GND_L02_P008" (solid, remove dead copper, pour order 8): 0,-100 0,2100 3000,2100 3000,-100
GND on Bottom Layer "GND_L02_P010" (solid, remove dead copper, pour order 10): 1205,-145

## Text inside footprints (layer, text, board x,y; h text height)
J5: Mechanical 1 "Mech 2 - Clearance, move to internal plane if present" at 45.98,1922.63 h11.81; Mechanical 1 "Mech 1 - Slot cut-out" at 45.98,1942.32 h11.81; Mechanical 1 "Assign keep-out area to slot" at 45.98,1981.69 h11.81; Mechanical 1 "Alert PCB fab to slot details" at 45.98,1962 h11.81